# Altium PCB PiArcadeGPIOSmall.PcbDoc
Units mm, origin at the board's own origin, x right, y up, seen from the top; angles counter-clockwise.
Board outline 43.94 x 64.77 mm, 2 copper layers (Top Layer, Bottom Layer); 33 components, 30 nets, 124 pads, 0 vias.
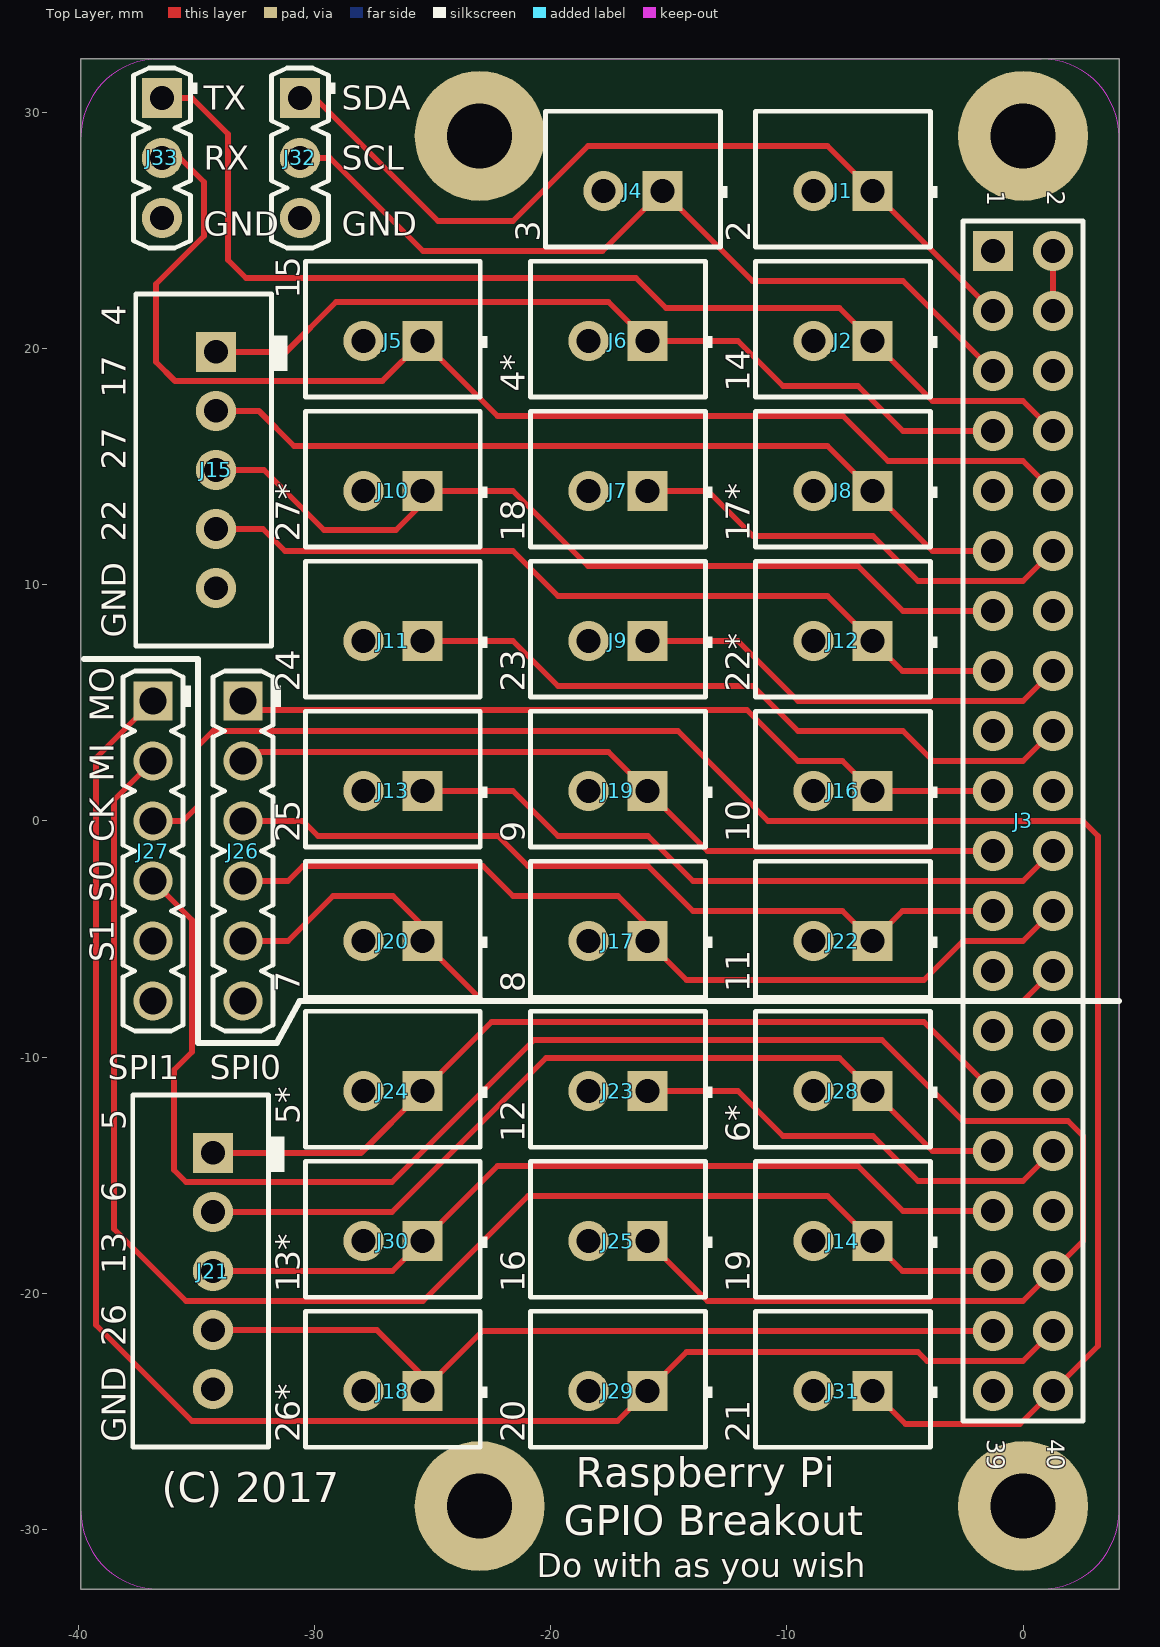
[diagram p0: Top Layer view]
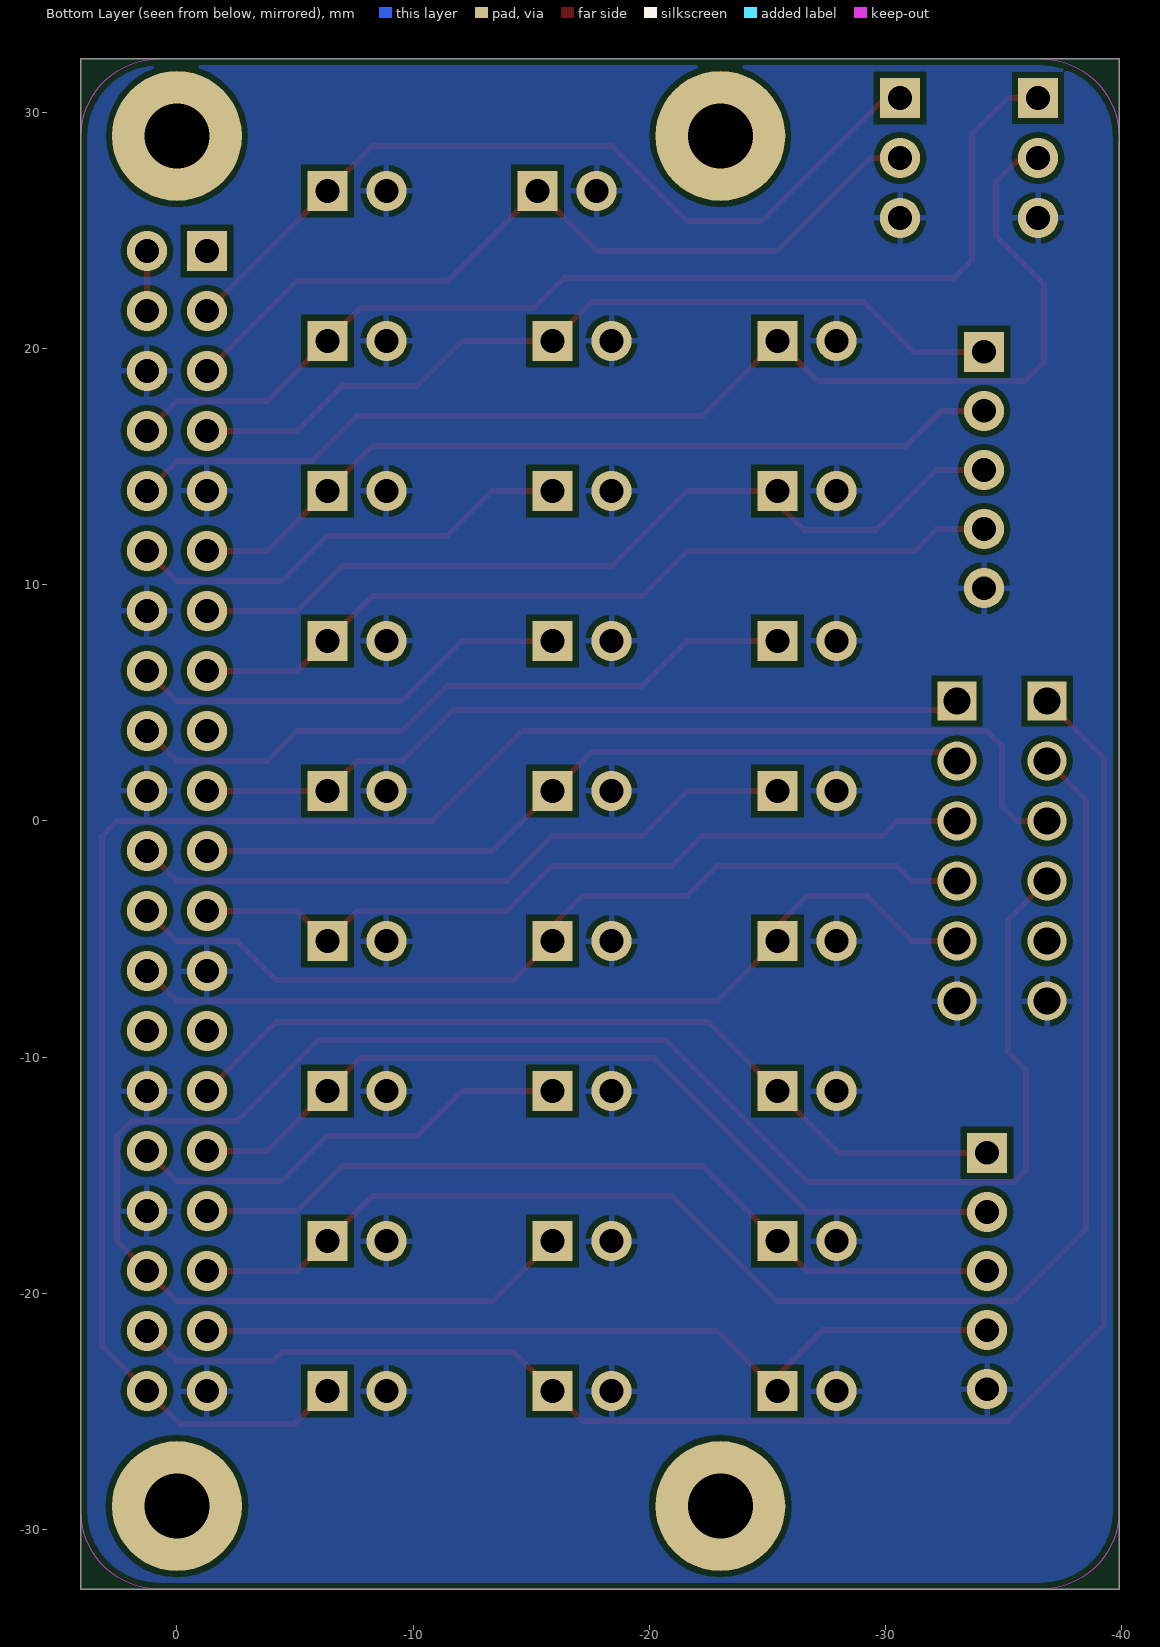
[diagram p1: Bottom Layer view, seen from below]
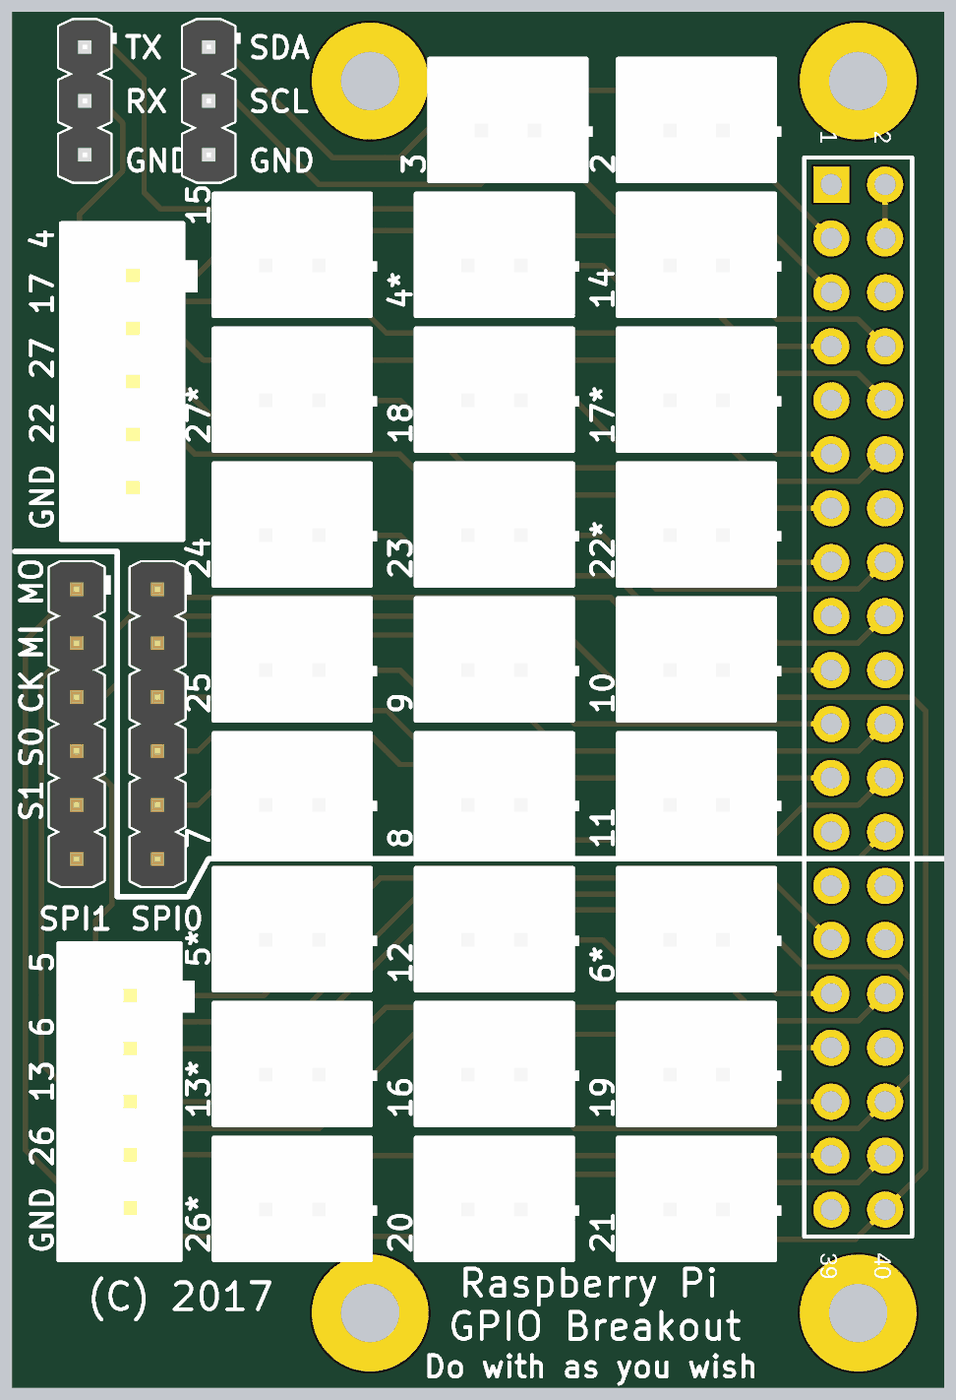
[diagram p2: 3D render of the assembled board from above, using the file's embedded part models]

## Layer stack, top to bottom
Top Solder: solder mask 0.0102, Solder Resist, Dk 3.5
Top Layer: signal copper 0.0356
Dielectric1: dielectric 0.32, FR-4, Dk 4.8
Bottom Layer: signal copper 0.0356
Bottom Solder: solder mask 0.0102, Solder Resist, Dk 3.5

## Board outline
-39.878,32.258 4.064,32.258 4.064,-32.512 -39.878,-32.512

## Design rules (kind name [scope] priority, off if disabled: settings)
Clearance [All] p1: gap=0.254
PolygonConnect [All] p1: connectstyle=Relief reliefconductorwidth=0.254 reliefentries=4 polygonreliefangle="90 Angle" airgapwidth=0.254
RoutingVias [All] p1: holewidth=0.711 width=1.27 viastyle="Through Hole" minholewidth=0.711 minwidth=1.27 maxholewidth=0.711 maxwidth=1.27
SilkToSolderMaskClearance SilkscreenOverComponentPads [IsPad] p1: minsilkscreentomaskgap=0.254 clearancetoexposedcopper=TRUE
SolderMaskExpansion [All] p1: expansion=0.102
Width [All] p1: maxlimit=0.254 minlimit=0.254 preferedwidth=0.254
29 further rules are at their usual default settings.

## Components (designator, comment, footprint, x,y, rotation, side; value= is the part's Value field where it differs from the comment)
J1 "B2B-XH-A(LF)(SN)" JST_B2B-XH-A -7.62,26.67 r180 top
J2 "B2B-XH-A(LF)(SN)" JST_B2B-XH-A -7.62,20.32 r180 top
J3 "Header 20X2" HDR2X20 -1.27,24.13 r270 top
J4 "B2B-XH-A(LF)(SN)" JST_B2B-XH-A -16.51,26.67 r180 top
J5 "B2B-XH-A(LF)(SN)" JST_B2B-XH-A -26.67,20.32 r180 top
J6 "B2B-XH-A(LF)(SN)" JST_B2B-XH-A -17.145,20.32 r180 top
J7 "B2B-XH-A(LF)(SN)" JST_B2B-XH-A -17.145,13.97 r180 top
J8 "B2B-XH-A(LF)(SN)" JST_B2B-XH-A -7.62,13.97 r180 top
J9 "B2B-XH-A(LF)(SN)" JST_B2B-XH-A -17.145,7.62 r180 top
J10 "B2B-XH-A(LF)(SN)" JST_B2B-XH-A -26.67,13.97 r180 top
J11 "B2B-XH-A(LF)(SN)" JST_B2B-XH-A -26.67,7.62 r180 top
J12 "B2B-XH-A(LF)(SN)" JST_B2B-XH-A -7.62,7.62 r180 top
J13 "B2B-XH-A(LF)(SN)" JST_B2B-XH-A -26.67,1.27 r180 top
J14 "B2B-XH-A(LF)(SN)" JST_B2B-XH-A -7.62,-17.78 r180 top
J15 "B5B-XH-A(LF)(SN)" JST_B5B-XH-A -34.163,14.859 r270 top
J16 "B2B-XH-A(LF)(SN)" JST_B2B-XH-A -7.62,1.27 r180 top
J17 "B2B-XH-A(LF)(SN)" JST_B2B-XH-A -17.145,-5.08 r180 top
J18 "B2B-XH-A(LF)(SN)" JST_B2B-XH-A -26.67,-24.13 r180 top
J19 "B2B-XH-A(LF)(SN)" JST_B2B-XH-A -17.145,1.27 r180 top
J20 "B2B-XH-A(LF)(SN)" JST_B2B-XH-A -26.67,-5.08 r180 top
J21 "B5B-XH-A(LF)(SN)" JST_B5B-XH-A -34.29,-19.05 r270 top
J22 "B2B-XH-A(LF)(SN)" JST_B2B-XH-A -7.62,-5.08 r180 top
J23 "B2B-XH-A(LF)(SN)" JST_B2B-XH-A -17.145,-11.43 r180 top
J24 "B2B-XH-A(LF)(SN)" JST_B2B-XH-A -26.67,-11.43 r180 top
J25 "B2B-XH-A(LF)(SN)" JST_B2B-XH-A -17.145,-17.78 r180 top
J26 "61300611121" WURTH_61300611121 -33.02,-1.27 r270 top
J27 "61300611121" WURTH_61300611121 -36.83,-1.27 r270 top
J28 "B2B-XH-A(LF)(SN)" JST_B2B-XH-A -7.62,-11.43 r180 top
J29 "B2B-XH-A(LF)(SN)" JST_B2B-XH-A -17.145,-24.13 r180 top
J30 "B2B-XH-A(LF)(SN)" JST_B2B-XH-A -26.67,-17.78 r180 top
J31 "B2B-XH-A(LF)(SN)" JST_B2B-XH-A -7.62,-24.13 r180 top
J32 "68001-403HLF" FCI_68001-403HLF -30.607,28.067 r270 top
J33 "68001-403HLF" FCI_68001-403HLF -36.449,28.067 r270 top

## Footprints (in the part's own frame and the unit in brackets; to place one, negate y for a bottom-side part, rotate by r counter-clockwise, add the part's x,y. Pads: shape width x height; smd on the part's side, far side on the other; paste and mask are expansions set on the pad)
FCI_68001-403HLF [mm] "Header, 2.54mm, 3x1, TH"
  rect 1.7x1.7 hole 1: 1(-2.54,0)
  round 1.7 hole 1: 2(0,0) 3(2.54,0)
  silkscreen extent -3.81,-1.21 3.81,1.5, body extent -3.81,-1.21 3.81,1.21, height 8.38
HDR2X20 [mm] "Connector; Header; 20x2 Position"
  rect 1.7x1.7 hole 1: 1(0,0)
  round 1.7 hole 1: 2(0,2.54) 3(2.54,0) 4(2.54,2.54) 5(5.08,0) 6(5.08,2.54) 7(7.62,0) 8(7.62,2.54) 9(10.16,0) 10(10.16,2.54) 11(12.7,0) 12(12.7,2.54) 13(15.24,0) 14(15.24,2.54) 15(17.78,0) 16(17.78,2.54) 17(20.32,0) 18(20.32,2.54) 19(22.86,0) 20(22.86,2.54) 21(25.4,0) 22(25.4,2.54) 23(27.94,0) 24(27.94,2.54) 25(30.48,0) 26(30.48,2.54) 27(33.02,0) 28(33.02,2.54) 29(35.56,0) 30(35.56,2.54) 31(38.1,0) 32(38.1,2.54) 33(40.64,0) 34(40.64,2.54) 35(43.18,0) 36(43.18,2.54) 37(45.72,0) 38(45.72,2.54) 39(48.26,0) 40(48.26,2.54)
  silkscreen extent -1.27,-1.27 49.53,3.81
JST_B2B-XH-A [mm] "Header (Shrouded), 2.5mm, 2x1, TH"
  rect 1.7x1.7 hole 1: 1(-1.25,0)
  round 1.7 hole 1: 2(1.25,0)
  silkscreen extent -4,-3.37 3.7,2.38, body extent -3.7,-3.37 3.7,2.38, height 7
JST_B5B-XH-A [mm] "Header(shrouded), 2.5mm, 5x1, TH"
  rect 1.7x1.7 hole 1: 1(-5,0)
  round 1.7 hole 1: 2(-2.5,0) 3(0,0) 4(2.5,0) 5(5,0)
  silkscreen extent -7.45,-3.4 7.45,3.03, body extent -7.45,-3.4 7.45,2.35, height 7.01
WURTH_61300611121 [mm] "Header, 2.54mm, 6x1, TH"
  rect 1.65x1.65 hole 1.15: 1(-6.35,0)
  round 1.65 hole 1.15: 2(-3.81,0) 3(-1.27,0) 4(1.27,0) 5(3.81,0) 6(6.35,0)
  silkscreen extent -7.62,-1.27 7.62,1.6, body extent -7.62,-1.27 7.62,1.27, height 8.54

## Part data
J1 J2 J4 J5 J6 J7 J8 J9 J10 J11 J12 J13 J14 J16 J17 J18 J19 J20 J22 J23 J24 J25 J28 J29 J30 J31: "Header (Shrouded), 2.5mm, 2x1, Tin, TH"
J3: "Header, 20-Pin, Dual row"
J15 J21: "Header(shrouded), 2.5mm, 5x1, Tin, TH"
J26 J27: "Header, 2.54 mm, 6x1, Gold, TH"
J32 J33: "Header, 2.54mm, 3x1, Tin, TH"

## Free pads (board coordinates)
  round 5.5 hole 2.75: 1(-23,-29) 1(-23,29) 1(0,-29) 1(0,29)

## Nets (pads, with @x,y where several pads share a name; then routed paths per layer and width w, separated by ;. In a path a pad name is that pad's centre, name@x,y a point inside that pad or via, vN(x,y) a via of type N, cw(c..) or ccw(c..) an arc to the next point about the centre after c; other vN are vias at no path point)
GND: J1.2 J2.2 J3.6 J3.9 J3.14 J3.20 J3.25 J3.30 J3.34 J3.39 J4.2 J5.2 J6.2 J7.2 J8.2 J9.2 J10.2 J11.2 J12.2 J13.2 J14.2 J15.5 J16.2 J17.2 J18.2 J19.2 J20.2 J21.5 J22.2 J23.2 J24.2 J25.2 J26.6 J27.6 J28.2 J29.2 J30.2 J31.2 J32.3 J33.3
GPIO_2/SDA1: J1.1 J3.3 J32.1 | length 35.7
  Top Layer w0.254: J32.1 -29.972,30.607 -24.765,25.4 -21.59,25.4 -18.415,28.575 -8.275,28.575 J1.1 -1.29,21.59 J3.3
GPIO_3/SCL1: J3.5 J4.1 J32.2 | length 35.2
  Top Layer w0.254: J32.2 -29.337,28.067 -25.4,24.13 -17.8,24.13 J4.1 -11.45,22.86 -5.08,22.86 J3.5
GPIO_4: J3.7 J6.1 J15.1 | length 36
  Top Layer w0.254: J15.1 -31.195,19.859 -29.083,21.971 -17.546,21.971 J6.1 -12.065,20.32 -10.16,18.415 -6.985,18.415 -5.08,16.51 J3.7
GPIO_5: J3.29 J21.1 J24.1 | length 36.5
  Top Layer w0.254: J21.1 -28.02,-14.05 -25.42,-11.45 J24.1 -22.499,-8.509 -4.191,-8.509 J3.29
GPIO_6: J3.31 J21.2 J28.1 | length 37.4
  Top Layer w0.254: J21.2 -28.431,-16.55 -28.43,-16.549 -27.41,-16.549 -27.409,-16.55 -26.71,-16.55 -20.193,-10.033 -7.767,-10.033 J28.1 -3.83,-13.97 J3.31
GPIO_7/CS1N0: J3.26 J20.1 J26.5 | length 37.8
  Top Layer w0.254: J26.5 -31.115,-5.08 -29.21,-3.175 -26.67,-3.175 -25.42,-4.425 J20.1 -22.88,-7.62 0,-7.62 J3.26
GPIO_8/CS0N0: J3.24 J17.1 J26.4 | length 38.1
  Top Layer w0.254: J26.4 -31.115,-2.54 -30.48,-1.905 -22.86,-1.905 -21.59,-3.175 -17.145,-3.175 -15.895,-4.425 J17.1 -14.244,-6.731 -4.191,-6.731 -2.54,-5.08 0,-5.08 J3.24
GPIO_9/MISO0: J3.21 J19.1 J26.2 | length 33.6
  Top Layer w0.254: J26.2 -32.639,2.921 -17.546,2.921 J19.1 -13.355,-1.27 J3.21
GPIO_10/MOSI0: J3.19 J16.1 J26.1 | length 33.3
  Top Layer w0.254: J26.1 -32.639,4.699 -11.684,4.699 -9.525,2.54 -7.64,2.54 J16.1 J3.19
GPIO_11/SCLK0: J3.23 J22.1 J26.3 | length 34.4
  Top Layer w0.254: J26.3 -30.48,0 -29.845,-0.635 -22.225,-0.635 -20.955,-1.905 -15.875,-1.905 -13.97,-3.81 -7.64,-3.81 J22.1 -5.1,-3.81 J3.23
GPIO_12: J3.32 J23.1 | length 19.3
  Top Layer w0.254: J23.1 -12.065,-11.43 -10.16,-13.335 -6.35,-13.335 -4.445,-15.24 0,-15.24 J3.32
GPIO_13: J3.33 J21.3 J30.1 | length 35.7
  Top Layer w0.254: J21.3 -26.69,-19.05 J30.1 -22.245,-14.605 -6.985,-14.605 -5.08,-16.51 J3.33
GPIO_14/TXD0: J2.1 J3.8 J33.1 | length 46.7
  Top Layer w0.254: J33.1 -35.179,30.607 -33.655,29.083 -33.655,23.749 -32.893,22.987 -16.383,22.987 -15.113,21.717 -7.767,21.717 J2.1 -3.83,17.78 0,17.78 J3.8
GPIO_15/RXD0: J3.10 J5.1 J33.2 | length 52.3
  Top Layer w0.254: J33.2 -35.687,28.067 -34.671,27.051 -34.671,24.765 -36.703,22.733 -36.703,19.431 -35.9,18.628 -27.112,18.628 J5.1 -22.245,17.145 -7.62,17.145 -5.715,15.24 0,15.24 J3.10
GPIO_16/CS0N1: J3.36 J25.1 J27.4 | length 81.1
  Top Layer w0.254: J27.4 -35.179,-4.191 -35.179,-9.779 -35.941,-10.541 -35.941,-14.773 -35.433,-15.281 -26.711,-15.281 -20.701,-9.271 -5.969,-9.271 -2.54,-12.7 1.905,-12.7 2.54,-13.335 2.54,-17.78 J3.36 0,-20.32 -13.355,-20.32 J25.1
GPIO_17: J3.11 J8.1 J15.2 | length 35.3
  Top Layer w0.254: J15.2 -32.345,17.359 -30.861,15.875 -8.275,15.875 J8.1 -3.83,11.43 J3.11
GPIO_18: J3.12 J7.1 | length 19.3
  Top Layer w0.254: J7.1 -13.335,13.97 -11.43,12.065 -6.35,12.065 -4.445,10.16 0,10.16 J3.12
GPIO_19/MISO1: J3.35 J14.1 J27.2 | length 62.1
  Top Layer w0.254: J27.2 -38.481,0.889 -38.481,-17.271 -35.433,-20.319 -33.78,-20.319 -33.779,-20.32 -25.4,-20.32 -20.955,-15.875 -8.275,-15.875 J14.1 -5.1,-19.05 J3.35
GPIO_20/MOSI1: J3.38 J27.1 J29.1 | length 71.5
  Top Layer w0.254: J27.1 -39.243,2.667 -39.243,-21.336 -35.179,-25.4 -17.165,-25.4 J29.1 -14.244,-22.479 -4.445,-22.479 -4.064,-22.86 0,-22.86 J3.38
GPIO_21/SCLK1: J3.40 J27.3 J31.1 | length 78
  Top Layer w0.254: J27.3 -35.56,0 -34.925,0.635 -34.925,3.175 -34.29,3.81 -14.605,3.81 -10.795,0 2.54,0 3.175,-0.635 3.175,-22.225 J3.40 -0.127,-25.527 -4.973,-25.527 J31.1
GPIO_22: J3.15 J12.1 J15.4 | length 35.4
  Top Layer w0.254: J15.4 -32.171,12.359 -31.242,11.43 -21.59,11.43 -19.685,9.525 -8.275,9.525 J12.1 -5.1,6.35 J3.15
GPIO_23: J3.16 J9.1 | length 18.7
  Top Layer w0.254: J9.1 -12.065,7.62 -9.525,5.08 0,5.08 J3.16
GPIO_24: J3.18 J11.1 | length 29.3
  Top Layer w0.254: J11.1 -21.59,7.62 -19.685,5.715 -11.43,5.715 -9.525,3.81 -5.08,3.81 -3.81,2.54 0,2.54 J3.18
GPIO_25: J3.22 J13.1 | length 28.8
  Top Layer w0.254: J13.1 -21.59,1.27 -19.685,-0.635 -15.875,-0.635 -13.97,-2.54 0,-2.54 J3.22
GPIO_26: J3.37 J18.1 J21.4 | length 35.5
  Top Layer w0.254: J21.4 -27.345,-21.55 -25.42,-23.475 J18.1 -22.88,-21.59 J3.37
GPIO_27: J3.13 J10.1 J15.3 | length 37
  Top Layer w0.254: J15.3 -32.131,14.859 -29.591,12.319 -26.543,12.319 -25.42,13.442 J10.1 -21.59,13.97 -18.415,10.795 -6.985,10.795 -5.08,8.89 J3.13
V3V3: J3.17
V3V31: J3.1
V5V: J3.2 J3.4 | length 2.5
  Top Layer w0.254: J3.4 J3.2
pads on no net: J3.27 J3.28 J27.5

## Polygon pours and split planes (outlines as drawn)
GND on Bottom Layer "GND-bottom" (solid, remove dead copper, pour order 2): -39.878,32.131 3.937,32.131 3.937,-3.24 3.937,-32.512 -32.231,-32.512 -39.878,-32.512

## Keep-outs
Keep-Out Layer:
  lines w0.025: -39.878,-29.464 -39.878,28.702 ; -39.878,-29.21 ccw(c-36.576,-29.21) -36.576,-32.512 ; -39.878,28.956 cw(c-36.576,28.956) -36.576,32.258 ; -36.83,-32.512 0.762,-32.512 ccw(c0.762,-29.21) 4.064,-29.21 4.064,28.956 ccw(c0.762,28.956) 0.762,32.258 -36.83,32.258

## Silkscreen, mask and mechanical layers (free items; w line width, h text height)
Top Overlay:
  lines w0.254: -39.751,6.858 -34.925,6.858 -34.925,6.604 -34.925,-9.398 -31.588,-9.398 -30.619,-7.62 4.064,-7.62
  text "TX" at -34.671,30.099 h1.02
  text "SDA" at -28.829,30.099 h1.02
  text "RX" at -34.671,27.559 h1.02
  text "SCL" at -28.829,27.559 h1.02
  text "GND" at -34.671,24.765 h1.02
  text "GND" at -28.829,24.765 h1.02
  text "3" at -20.447,24.511 h1.02 r90
  text "2" at -11.54,24.511 h1.02 r90
  text "15" at -30.607,22.098 h1.02 r90
  text "4" at -37.973,20.955 h1.02 r90
  text "4*" at -21.082,18.161 h1.02 r90
  text "14" at -11.557,18.161 h1.02 r90
  text "17" at -37.973,17.907 h1.02 r90
  text "27" at -37.973,14.859 h1.02 r90
  text "22" at -37.973,11.811 h1.02 r90
  text "27*" at -30.607,11.811 h1.02 r90
  text "18" at -21.082,11.811 h1.02 r90
  text "17*" at -11.557,11.811 h1.02 r90
  text "GND" at -37.973,7.747 h1.02 r90
  text "24" at -30.607,5.461 h1.02 r90
  text "23" at -21.082,5.461 h1.02 r90
  text "22*" at -11.557,5.461 h1.02 r90
  text "MO" at -38.481,4.191 h1.02 r90
  text "MI" at -38.481,1.651 h1.02 r90
  text "CK" at -38.481,-0.889 h1.02 r90
  text "25" at -30.607,-0.889 h1.02 r90
  text "9" at -21.082,-0.889 h1.02 r90
  text "10" at -11.557,-0.889 h1.02 r90
  text "S0" at -38.481,-3.429 h1.02 r90
  text "S1" at -38.481,-5.969 h1.02 r90
  text "7" at -30.607,-7.239 h1.02 r90
  text "8" at -21.082,-7.239 h1.02 r90
  text "11" at -11.557,-7.239 h1.02 r90
  text "SPI1" at -38.735,-10.922 h1.02
  text "SPI0" at -34.417,-10.922 h1.02
  text "5*" at -30.607,-12.827 h1.02 r90
  text "5" at -37.973,-13.081 h1.02 r90
  text "12" at -21.082,-13.589 h1.02 r90
  text "6*" at -11.557,-13.589 h1.02 r90
  text "6" at -37.973,-16.129 h1.02 r90
  text "13" at -37.973,-19.177 h1.02 r90
  text "13*" at -30.607,-19.939 h1.02 r90
  text "16" at -21.082,-19.939 h1.02 r90
  text "19" at -11.557,-19.939 h1.02 r90
  text "26" at -37.973,-22.225 h1.02 r90
  text "GND" at -37.973,-26.289 h1.02 r90
  text "26*" at -30.607,-26.289 h1.02 r90
  text "20" at -21.082,-26.289 h1.02 r90
  text "21" at -11.557,-26.289 h1.02 r90
  text "Raspberry Pi" at -18.923,-28.194 h1.27
  text "(C) 2017" at -36.449,-28.829 h1.27
  text "GPIO Breakout" at -19.431,-30.226 h1.27
  text "Do with as you wish" at -20.574,-32.004 h1.02
Mechanical 1:
  lines w0.025: -39.878,-29.21 ccw(c-36.576,-29.21) -36.576,-32.512 ; -39.878,-28.956 -39.878,29.21 ; -39.878,28.956 cw(c-36.576,28.956) -36.576,32.258 0.762,32.258 cw(c0.762,28.956) 4.064,28.956 4.064,-29.21 cw(c0.762,-29.21) 0.762,-32.512 -36.83,-32.512

## Text inside footprints (layer, text, board x,y; h text height)
J3: Top Overlay "39" at -1.778,-26.162 h1.27 r270; Top Overlay "40" at 0.762,-26.162 h1.27 r270; Top Overlay "2" at 0.762,26.67 h1.27 r270; Top Overlay "1" at -1.778,26.67 h1.27 r270